# Altium PCB MainPCBV6.PcbDoc (part 5 of 5)
Units mm, origin at the board's own origin, x right, y up, seen from the top; angles counter-clockwise.
Board outline 176 x 144.01 mm, 2 copper layers (Top Layer, Bottom Layer); 232 components, 243 nets, 937 pads, 277 vias.
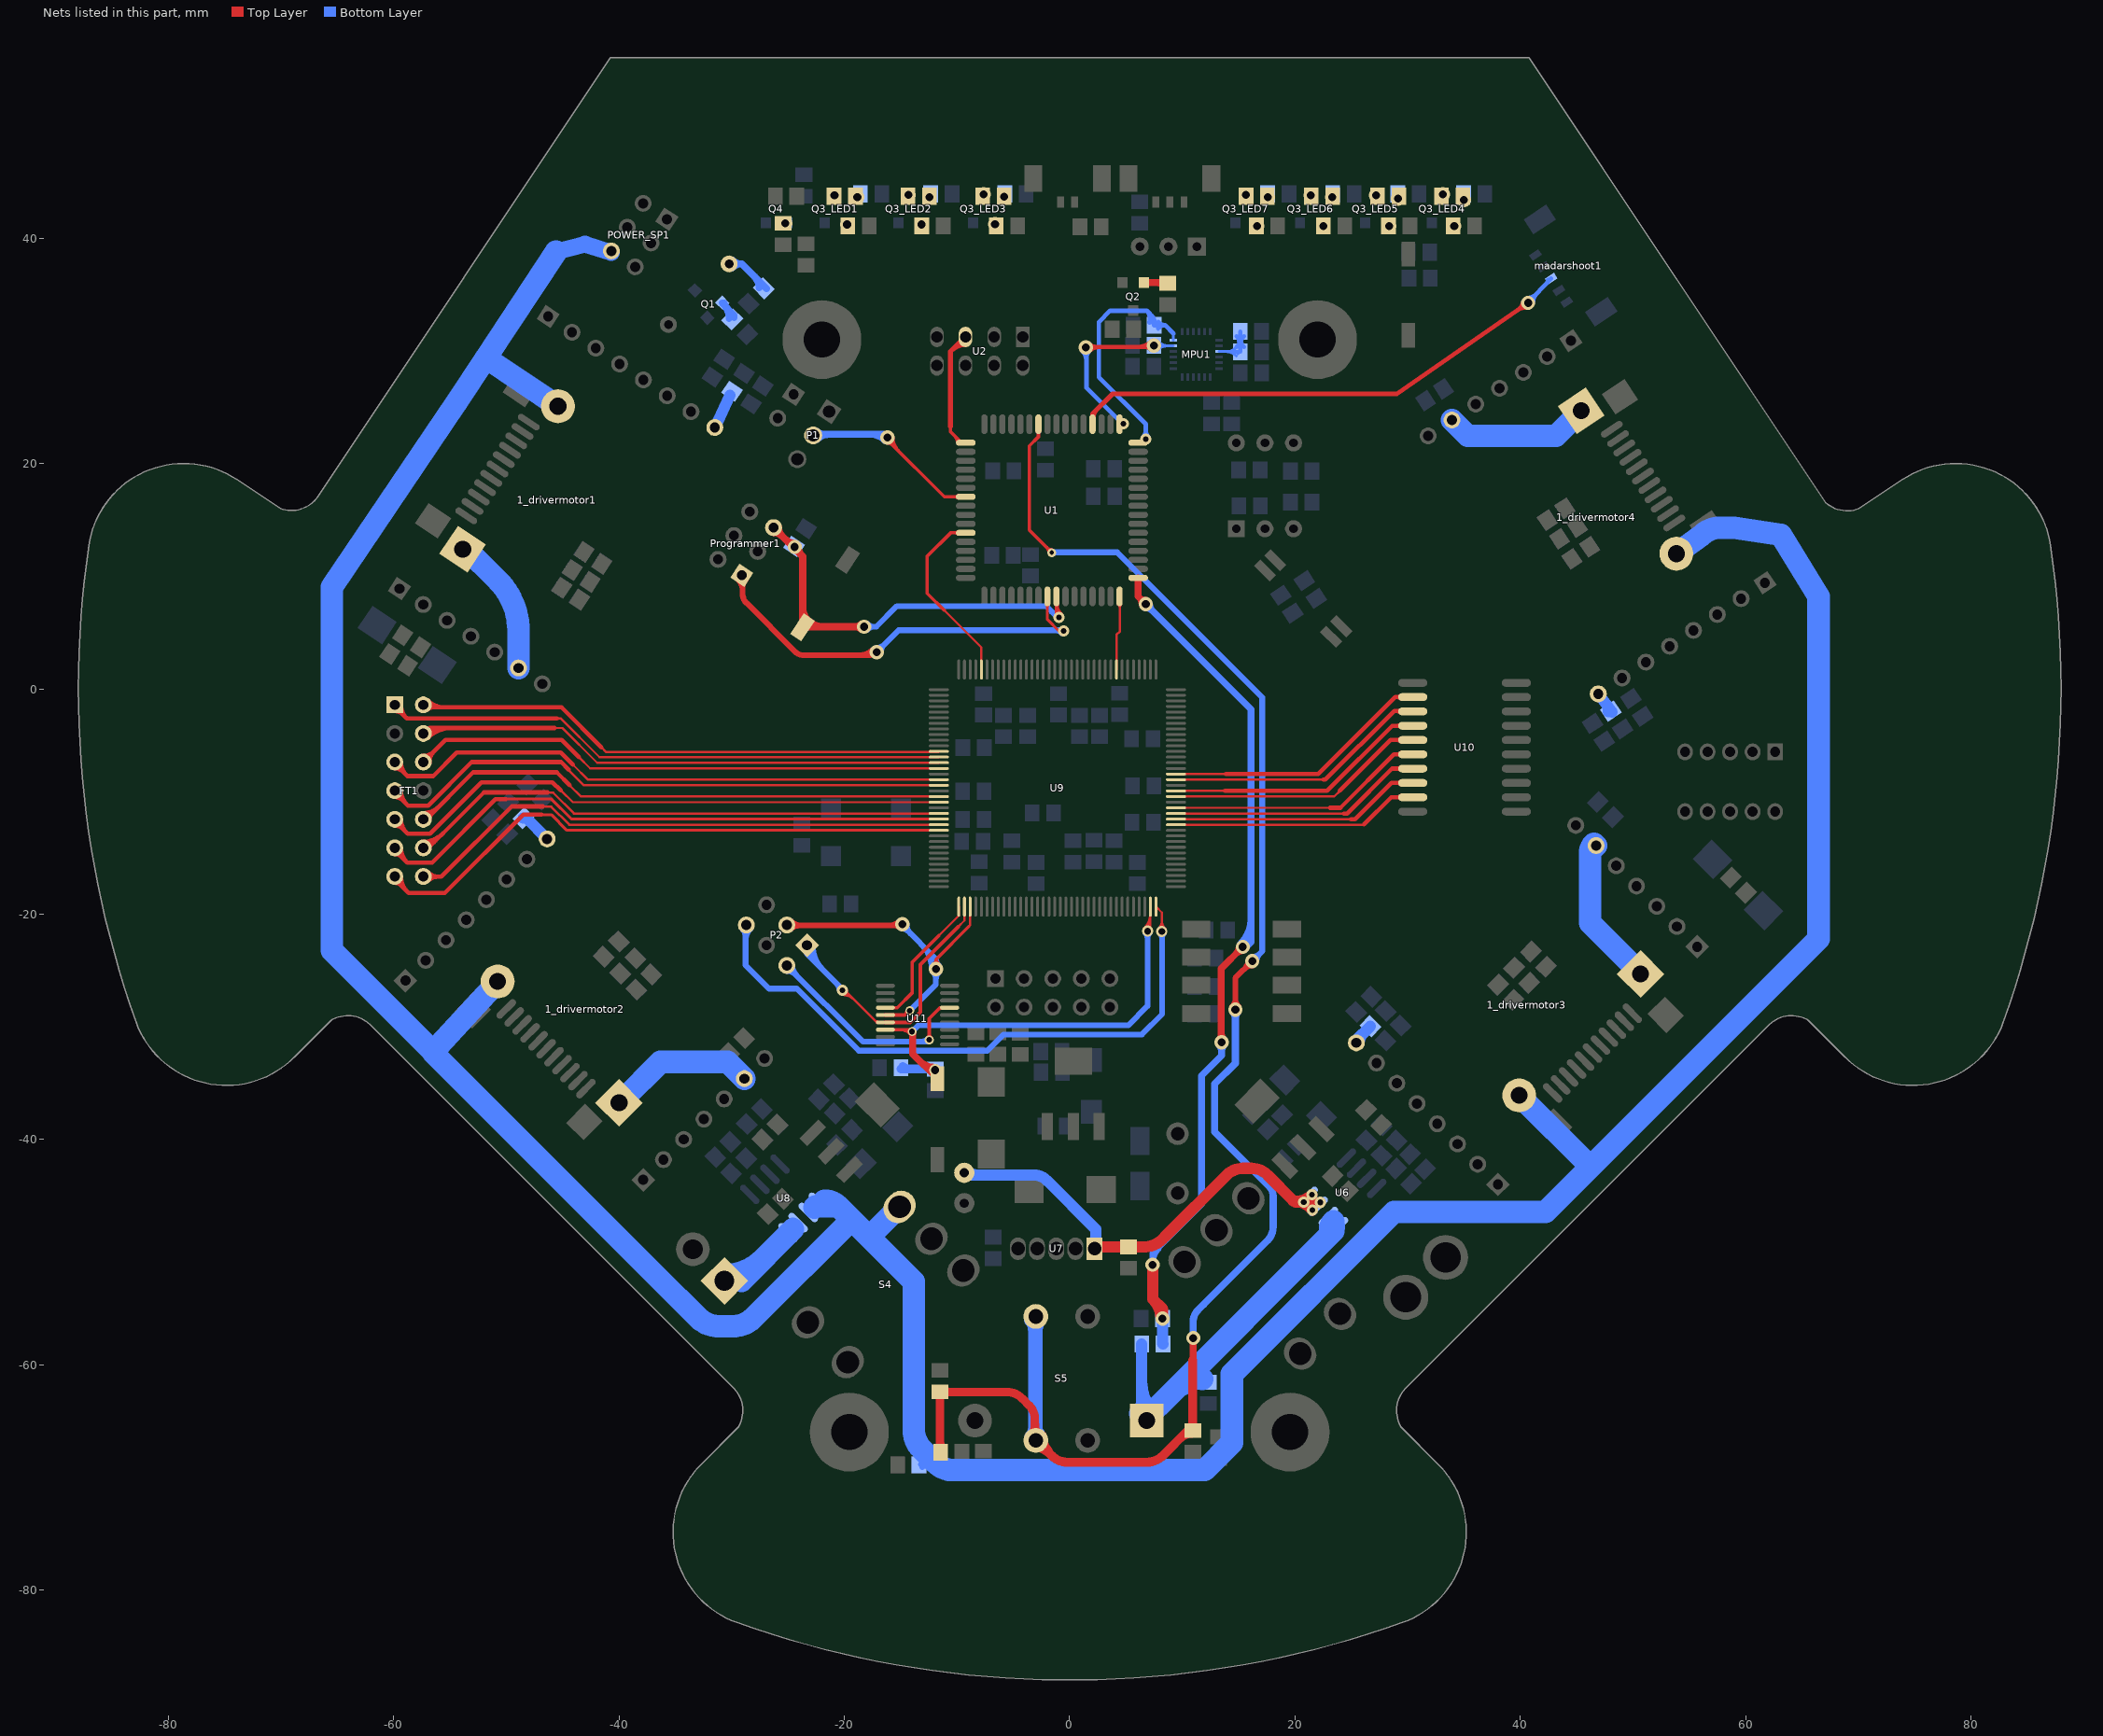
[diagram p5: the nets of this part, all layers, seen from the top]

## Via types
v1: diameter 1.27, hole 0.711, Top Layer to Bottom Layer, 228 vias
v2: diameter 1, hole 0.5, Top Layer to Bottom Layer, 16 vias
v3: diameter 2, hole 1, Top Layer to Bottom Layer, 11 vias
v4: diameter 0.8, hole 0.5, Top Layer to Bottom Layer, 5 vias
v5: diameter 1, hole 0.7, Top Layer to Bottom Layer, 5 vias
v6: diameter 1.2, hole 0.6, Top Layer to Bottom Layer, 3 vias
v7: diameter 1.778, hole 0.965, Top Layer to Bottom Layer, 2 vias
v8: diameter 1, hole 0.6, Top Layer to Bottom Layer, 2 vias
v9: diameter 0.9, hole 0.5, Top Layer to Bottom Layer, 1 vias
v10: diameter 0.7, hole 0.45, Top Layer to Bottom Layer, 1 vias
v11: diameter 1.2, hole 0.9, Top Layer to Bottom Layer, 1 vias
v12: diameter 0.8, hole 0.4, Top Layer to Bottom Layer, 1 vias
v13: diameter 1.1, hole 0.711, Top Layer to Bottom Layer, 1 vias

## Nets (pads, with @x,y where several pads share a name; then routed paths per layer and width w, separated by ;. In a path a pad name is that pad's centre, name@x,y a point inside that pad or via, vN(x,y) a via of type N, cw(c..) or ccw(c..) an arc to the next point about the centre after c; other vN are vias at no path point) (continued)
NetLED1_LED1_1: LED1_LED1.1 R34_LED1.1
  other v1: -18.853,43.637
NetLED1_LED1_2: LED1_LED1.2 Q3_LED1.1
  other v1: -20.879,43.815
NetLED1_LED2_1: LED1_LED2.1 R34_LED2.1
  other v1: -12.446,43.637
NetLED1_LED2_2: LED1_LED2.2 Q3_LED2.1
  other v1: -14.326,43.84
NetLED1_LED3_1: LED1_LED3.1 R34_LED3.1
  other v1: -5.817,43.688
NetLED1_LED3_2: LED1_LED3.2 Q3_LED3.1
  other v1: -7.645,43.891
NetLED1_LED4_1: LED1_LED4.1 R34_LED4.1
  other v1: 34.976,43.409
NetLED1_LED4_2: LED1_LED4.2 Q3_LED4.1
  other v1: 33.122,43.891
NetLED1_LED5_1: LED1_LED5.1 R34_LED5.1
  other v1: 29.159,43.536
NetLED1_LED5_2: LED1_LED5.2 Q3_LED5.1
  other v1: 27.203,43.815
NetLED1_LED6_1: LED1_LED6.1 R34_LED6.1
  other v1: 23.317,43.663
NetLED1_LED6_2: LED1_LED6.2 Q3_LED6.1
  other v1: 21.412,43.815
NetLED1_LED7_1: LED1_LED7.1 R34_LED7.1
  other v1: 17.602,43.637
NetLED1_LED7_2: LED1_LED7.2 Q3_LED7.1
  other v1: 15.646,43.866
NetLS1_2: LS1.2 R16.2 | length 6.9
  Bottom Layer w0.635: LS1.2@-30.234,37.725 -29.115,37.725 R16.2@-26.917,35.528 ; LS1.2@-29.928,37.419 cw(c-29.19,36.681) -29.19,37.725 cw(c-29.19,38.769) LS1.2@-29.928,38.031 ; -27.969,36.579 cw(c-28.931,35.617) R16.2@-27.57,35.617
NetMPU1_9: MPU1.9 R43.1 R44.2 | length 11.8
  Bottom Layer w0.254: MPU1.9@13.26,29.943 15.135,29.943 R44.2@15.136,29.941 ; 13.847,29.943 cw(c13.847,28.618) R44.2@14.783,29.555 ; 13.934,29.943 ccw(c13.934,31.144) R44.2@14.783,30.294 ; 14.46,29.943 cw(c14.46,29.232) R44.2@14.963,29.734
  Bottom Layer w0.381: R43.1@14.811,31.3 cw(c14.027,30.515) 15.136,30.515 cw(c16.246,30.515) R43.1@15.461,31.3 ; R44.2@14.828,30.349 ccw(c14.083,31.094) R43.1@15.136,31.094 ; R44.2@14.871,30.387 ccw(c14.579,30.761) 15.037,30.884 ; R44.2@14.923,30.422 ccw(c14.613,30.96) 15.212,30.8 ; 15.042,30.866 ccw(c15.748,31.055) R44.2@15.383,30.422 ; R43.1@15.136,31.174 ccw(c16.302,31.174) R44.2@15.478,30.349 ; R43.1@15.136,31.725 15.136,29.941 R44.2@15.153,29.925 ; 15.221,30.831 ccw(c15.576,30.735) R44.2@15.388,30.419
NetProgrammer1_1: Programmer1.1 U1.56 | length 44.3
  Top Layer w0.254: U1.56@-2.079,7.495 cw(c-2.332,7.242) -1.975,7.242 cw(c-1.617,7.242) U1.56@-1.87,7.495 ; U1.56@-1.975,8.2 -1.975,6.147 -0.959,5.131 v2(-0.533,5.131)
  Top Layer w0.508: Programmer1.1@-29.456,9.735 cw(c-30.478,8.712) -29.032,8.712 ; -29.032,9.064 cw(c-28.083,9.064) Programmer1.1@-28.754,9.735 ; Programmer1.1@-29.032,10.439 -29.032,8.407 ccw(c-27.928,8.407) -28.709,7.627 -24.395,3.313 ; -24.394,3.312 ccw(c-23.571,4.137) -23.571,2.972 -17.831,2.972 ; -18.751,2.972 ccw(c-18.751,4.873) v1@-17.406,3.529 ; v1@-17.518,3.273 cw(c-17.831,3.285) -17.831,2.972 ; v1(-17.137,3.259) cw(c-17.831,3.953) -17.831,2.972
  Bottom Layer w0.508: v1(-17.137,3.259) -15.189,5.207 -0.61,5.207 v2(-0.533,5.131) ; v1@-17.137,3.64 ccw(c-17.137,4.56) -16.487,3.91 ccw(c-15.836,3.259) v1@-16.756,3.259 ; -1.311,5.207 cw(c-1.311,4.353) v2@-0.707,4.957
NetProgrammer1_5: Programmer1.5 R17.2 Reset1.2 U1.57 | length 48.8
  Top Layer w0.305: U1.57@-1.261,7.513 cw(c-1.471,7.304) -1.175,7.304 cw(c-0.879,7.304) U1.57@-1.088,7.513 ; -1.175,6.959 ccw(c-0.356,6.959) v2@-0.935,6.38 ; U1.57@-1.175,7.695 ccw(c0.38,7.695) v2@-0.719,6.596 ; U1.57@-1.175,8.2 -1.175,6.737 -1.067,6.629 -1.067,6.325 -1.016,6.274 -0.991,6.274 -0.965,6.299 v2(-0.965,6.35)
  Top Layer w0.508: Reset1.2@-23.939,5.067 Reset1.2@-23.698,5.309
  Top Layer w0.635: Programmer1.5@-26.289,14.326 -23.698,11.735 Reset1.2@-23.698,5.309 ; Programmer1.5@-26.287,13.88 cw(c-26.287,12.807) -25.529,13.566 ; Programmer1.5@-25.855,14.312 ccw(c-24.839,14.312) -25.557,13.594 ; -25.212,13.248 ccw(c-24.409,14.05) v1@-24.409,12.916 ; v1@-24.092,12.598 ccw(c-22.957,12.598) -23.76,11.796 ; Reset1.2@-23.939,5.067 -23.495,5.512 v1(-18.263,5.512) ; -23.698,7.192 ccw(c-22.123,7.192) -23.237,6.079 ccw(c-21.868,7.447) -21.868,5.512 ; v1@-18.487,5.287 ccw(c-19.029,4.745) -19.029,5.512 ccw(c-19.029,6.278) v1@-18.487,5.736
  Bottom Layer w0.508: v1(-18.263,5.512) -17.17,5.512 -15.342,7.341 -2.083,7.341 -1.016,6.274 -0.991,6.274 -0.965,6.299 v2(-0.965,6.35) ; v1@-17.993,5.242 cw(c-17.343,4.592) -17.343,5.512 cw(c-17.343,6.432) v1@-17.993,5.781 ; -1.602,6.86 ccw(c-0.965,7.496) v2@-0.965,6.596
  other v1: -24.409,12.598
NetQ1_2: Q1.2 R15.2 | length 3.6
  Bottom Layer w0.6: Q1.2@-30.855,34.256 -29.783,33.184 R15.2@-29.783,32.955 ; Q1.2@-30.778,34.179 cw(c-32.083,32.873) R15.2@-30.237,32.873 ; Q1.2@-30.662,34.263 ccw(c-30.177,34.263) Q1.2@-30.52,33.921
NetQ2_2: Q2.2 R29.1 | length 3
  Top Layer w0.6: Q2.2@6.741,36.073 8.087,36.073 R29.1@8.346,35.814 ; 7.595,36.073 cw(c7.595,34.985) R29.1@8.365,35.755 ; 7.94,36.073 ccw(c7.94,36.675) R29.1@8.365,36.249
NetQ3_Led1_2: Q3_LED1.2 R33_LED1.2
  other v1: -19.761,41.224
NetQ3_Led2_2: Q3_LED2.2 R33_LED2.2
  other v1: -13.157,41.224
NetQ3_Led3_2: Q3_LED3.2 R33_LED3.2
  other v1: -6.629,41.25
NetQ3_LED4_2: Q3_LED4.2 R33_LED4.2
  other v1: 34.138,41.072
NetQ3_LED5_2: Q3_LED5.2 R33_LED5.2
  other v1: 28.372,41.072
NetQ3_LED6_2: Q3_LED6.2 R33_LED6.2
  other v1: 22.53,41.072
NetQ3_LED7_2: Q3_LED7.2 R33_LED7.2
  other v1: 16.637,41.072
NetQ4_2: Q4.2 R54.2
  other v1: -25.248,41.326
PARITY: U1.64 U9.44 | length 7.2
  Top Layer w0.203: U9.44@4.158,1.711 4.158,4.793 4.47,5.105 U1.64@4.47,8.103 ; U1.64@4.303,7.477 cw(c3.897,7.072) 4.47,7.072 ; 4.47,7.29 cw(c4.735,7.29) U1.64@4.548,7.477
PROG_B: C70.2 R55.1 Reset-FPGA.2 U9.143 U11.7 | length 51.3
  Top Layer w0.203: U11.7@-16.337,-30.312 U11.7@-16.325,-30.299 ; v4@-14.214,-30.277 v4@-14.199,-30.277 ; v4@-14.021,-30.455 v4@-13.945,-30.531 ; v8@6.627,-21.232 ccw(c5.346,-19.951) U9.143@7.158,-19.951 ; v8@6.771,-21.376 ccw(c5.836,-20.441) 7.158,-20.441 ; v8(6.909,-21.514) 7.158,-21.265 U9.143@7.158,-19.339 ; v8@6.914,-21.519 ccw(c6.327,-20.932) 7.158,-20.932
  Top Layer w0.305: U11.7@-16.363,-30.261 v4@-14.214,-30.261 ; -14.999,-30.261 cw(c-14.999,-31.433) v4@-14.17,-30.604
  Top Layer w0.6: v4@-13.945,-30.531 -13.945,-32.417 Reset-FPGA.2@-11.76,-34.602 cw(c-11.471,-34.313) Reset-FPGA.2@-11.761,-34.024 ; -13.348,-33.014 ccw(c-11.938,-31.604) Reset-FPGA.2@-11.938,-33.598 ; -13.126,-33.236 ccw(c-11.76,-31.87) Reset-FPGA.2@-11.76,-33.802 ; -12.709,-33.547 cw(c-12.946,-34.43) Reset-FPGA.2@-12.155,-33.973
  Bottom Layer w0.203: v4@-13.894,-30.531 v4@-13.843,-30.582
  Bottom Layer w0.508: v4(-13.995,-30.429) -13.437,-29.87 5.207,-29.87 6.909,-28.169 v8(6.909,-21.514) ; v8@6.735,-21.688 cw(c6.315,-22.108) 6.909,-22.108 cw(c7.503,-22.108) v8@7.083,-21.688
  Bottom Layer w0.8: R55.1@-14.976,-33.757 C70.2@-12.243,-33.757 ; R55.1@-14.799,-33.553 ccw(c-14.307,-33.061) -14.307,-33.757 ; C70.2@-12.521,-33.757 cw(c-12.521,-34.431) C70.2@-12.044,-33.954
  other v13: -11.938,-33.848
SCK: U1.33 U2.5 | length 12.9
  Top Layer w0.305: -10.592,23.292 -10.592,22.835 -9.607,21.85 U1.33@-9.225,21.85 ; -10.188,22.431 cw(c-10.77,21.85) U1.33@-9.947,21.85
  Top Layer w0.432: -10.592,23.292 -10.592,29.947 U2.5@-9.22,31.318 ; -10.5,30.038 cw(c-9.246,28.784) U2.5@-9.246,30.558
SCK_CUR1: U1.43 U9.68 | length 16.8
  Top Layer w0.203: -11.151,6.985 -7.849,3.683 -7.849,3.092 -7.842,3.085 U9.68@-7.842,1.711
  Top Layer w0.305: -11.151,6.985 -12.649,8.484 -12.649,11.768 -10.568,13.85 U1.43@-9.225,13.85 ; U1.43@-9.911,13.763 ccw(c-10.121,13.554) -10.121,13.85 ccw(c-10.121,14.146) U1.43@-9.911,13.936
SEG1A: U9.12 U10.9 | length 22.6
  Top Layer w0.203: U9.12@9.433,-12.064 26.087,-12.064
  Top Layer w0.381: 26.137,-12.04 28.55,-9.627 U10.9@30.452,-9.627 ; U10.9@29.389,-9.739 ccw(c29.117,-10.012) 29.117,-9.627 ccw(c29.117,-9.242) U10.9@29.389,-9.514
SEG1B: U9.18 U10.4 | length 24
  Top Layer w0.203: U9.18@9.433,-9.064 13.767,-9.064
  Top Layer w0.381: 13.767,-9.064 22.839,-9.064 28.626,-3.277 U10.4@30.452,-3.277 ; U10.4@29.389,-3.389 ccw(c29.117,-3.662) 29.117,-3.277 ccw(c29.117,-2.892) U10.4@29.389,-3.164
SEG1C: U9.20 U10.3 | length 24
  Top Layer w0.203: U9.20@9.433,-8.064 22.504,-8.064
  Top Layer w0.381: 22.504,-8.064 22.696,-8.064 28.804,-1.956 30.401,-1.956 U10.3@30.452,-2.007 ; 28.994,-1.956 cw(c28.994,-2.514) U10.3@29.389,-2.119
SEG1D: U9.17 U10.5 | length 23.7
  Top Layer w0.203: U9.17@9.433,-9.564 23.47,-9.564 23.978,-9.056
  Top Layer w0.381: 23.978,-9.056 28.487,-4.547 U10.5@30.452,-4.547 ; U10.5@29.389,-4.659 ccw(c29.117,-4.932) 29.117,-4.547 ccw(c29.117,-4.162) U10.5@29.389,-4.434
SEG1DP: U9.21 U10.2 | length 24.5
  Top Layer w0.203: U9.21@9.433,-7.564 13.868,-7.564
  Top Layer w0.381: 13.868,-7.564 22.078,-7.564 28.905,-0.737 U10.2@30.452,-0.737 ; U10.2@29.389,-0.849 ccw(c29.117,-1.122) 29.117,-0.737 ccw(c29.117,-0.352) U10.2@29.389,-0.624
SEG1E: U9.15 U10.6 | length 23.6
  Top Layer w0.203: U9.15@9.433,-10.564 23.089,-10.564
  Top Layer w0.381: 23.089,-10.564 24.031,-10.564 28.778,-5.817 U10.6@30.452,-5.817 ; U10.6@29.389,-5.929 ccw(c29.117,-6.202) 29.117,-5.817 ccw(c29.117,-5.432) U10.6@29.389,-5.704
SEG1F: U9.13 U10.8 | length 23
  Top Layer w0.203: U9.13@9.433,-11.564 24.952,-11.564
  Top Layer w0.381: 24.952,-11.572 25.341,-11.572 28.556,-8.357 U10.8@30.452,-8.357 ; U10.8@29.389,-8.469 ccw(c29.117,-8.742) 29.117,-8.357 ccw(c29.117,-7.972) U10.8@29.389,-8.244
SEG1G: U9.14 U10.7 | length 23.3
  Top Layer w0.203: U9.14@9.433,-11.064 24.345,-11.064
  Top Layer w0.381: 24.345,-11.072 24.63,-11.072 28.615,-7.087 U10.7@30.452,-7.087 ; U10.7@29.389,-7.199 ccw(c29.117,-7.472) 29.117,-7.087 ccw(c29.117,-6.702) U10.7@29.389,-6.974
SEN-SCL: MPU1.23 R41.2 U1.17 | length 28.7
  Top Layer w0.4: v1@1.702,30.353 v1@7.182,30.353 ; v1@1.73,29.995 cw(c2.595,29.129) 2.595,30.353 ; v1@1.73,30.61 ccw(c2.35,31.23) 2.35,30.353 ; U1.17@4.425,23.5 v2@4.826,23.5 ; 6.121,30.353 ccw(c6.121,31.837) v1@7.17,30.788 ; 6.734,30.353 cw(c6.734,29.736) v1@7.17,30.172 ; v1@7.334,30.582 7.486,30.429 7.518,30.461 7.518,30.556 7.493,30.582 7.493,30.683 7.478,30.668 v1(7.478,30.48)
  Bottom Layer w0.254: v1(7.478,30.48) 7.478,30.668 7.493,30.683 7.493,30.582 7.518,30.556 7.518,30.461 7.486,30.429 R41.2@8.001,30.429 ; R41.2@7.493,30.443 MPU1.23@9.21,30.443 ; R41.2@7.657,30.66 ccw(c8.181,31.183) 8.181,30.443 ; R41.2@7.668,30.67 ccw(c8.217,31.22) 8.217,30.443 ; R41.2@7.837,30.121 cw(c8.614,29.344) 8.614,30.443 ; R41.2@7.837,30.839 ccw(c8.794,31.797) 8.794,30.443 ; R41.2@7.848,30.11 cw(c8.65,29.308) 8.65,30.443 ; R41.2@7.848,30.85 ccw(c8.831,31.833) 8.831,30.443
  Bottom Layer w0.4: v1@1.115,29.995 cw(c0.188,29.068) 1.499,29.068 ; 1.499,29.436 cw(c2.289,29.436) v1@1.73,29.995 ; v1@1.702,30.226 1.499,30.023 1.499,26.721 v2@4.775,23.444 ; 4.09,24.13 ccw(c4.775,24.815) v2@4.775,23.846 ; 4.335,23.884 cw(c3.996,23.546) v2@4.475,23.546
  other v1: 1.422,30.302
  other v2: 4.775,23.546
SEN-SDA: MPU1.24 R42.2 U1.16 | length 26.3
  Top Layer w0.4: U1.16@6.622,21.903 ccw(c6.298,22.227) v2@6.756,22.227 ; U1.16@6.628,21.908 ccw(c6.416,22.174) v2(6.756,22.174) v2@6.756,22.327
  Bottom Layer w0.254: R42.2@7.444,32.191 R42.2@7.916,32.191 ; MPU1.24@9.21,30.943 9.21,31.532
  Bottom Layer w0.4: v2@6.544,22.386 ccw(c6.032,22.898) 6.756,22.898 ccw(c7.481,22.898) v2@6.969,22.386 ; v2(6.756,22.174) 6.756,23.495 2.591,27.661 2.591,32.563 3.601,33.573 6.838,33.573 ; R42.2@7.078,32.531 ccw(c6.125,32.86) 6.838,33.573 ; 7.29,33.121 cw(c6.796,32.628) R42.2@7.456,32.4 ; R42.2@7.444,32.662 7.444,32.967 6.838,33.573 ; R42.2@7.503,32.283 8.458,32.283 ; R42.2@7.85,31.997 cw(c8.458,31.495) 8.458,32.283 ; R42.2@7.85,32.57 ccw(c8.458,33.072) 8.458,32.283 ; 9.21,31.532 8.458,32.283
SHG_PULSE: madarshoot1.3 U1.20 | length 50.1
  Top Layer w0.4: U1.20@2.025,23.5 2.025,24.403 3.81,26.187 29.057,26.187 ; U1.20@2.1,24.1 cw(c3.013,24.1) 2.367,24.745 ; 29.057,26.202 v1(40.691,34.265) ; v1@40.263,34.342 cw(c39.229,34.53) 39.828,33.666 cw(c40.426,32.803) v1@40.613,33.837
  Bottom Layer w0.4: v1@40.679,34.699 ccw(c40.65,35.749) 41.413,35.027 ccw(c42.175,34.305) v1@41.126,34.276 ; v1(40.691,34.265) madarshoot1.3@42.733,36.421 ; 42.359,36.026 ccw(c42.073,36.297) madarshoot1.3@42.467,36.307
SW1: F2.1 R35.2 R39.2 U6.1 U6.2 | length 38.2
  Bottom Layer w1: 6.391,-61.492 ccw(c10.314,-61.492) F2.1@7.54,-64.266 ; R39.2@6.391,-58.166 6.391,-64.531 F2.1@6.807,-64.948 ; F2.1@6.629,-65.176 F2.1@6.833,-64.973
  Bottom Layer w2: F2.1@6.256,-64.338 F2.1@6.562,-64.338 ; F2.1@6.562,-64.229 ccw(c6.562,-62.392) 7.861,-63.69 U6.1@23.419,-48.133 ; F2.1@6.985,-65.253 F2.1@6.985,-64.567 ; 9.883,-61.811 cw(c11.309,-63.237) R35.2@11.776,-61.275 ; 23.13,-47.812 ccw(c22.819,-47.501) 23.259,-47.501 ; U6.1@23.325,-47.994 ccw(c23.014,-47.683) 23.454,-47.683 ; U6.1@23.419,-48.038 23.419,-47.295
SW2: F1_drivermotor1.2 F1_drivermotor2.2 F1_drivermotor3.2 F1_drivermotor4.2 POWER_SP1.6 R36.2 S4.1 U8.1 U8.2 | length 348.3
  Bottom Layer w0.5: R36.2@-13.198,-68.859 -11.836,-68.859 ; R36.2@-13.093,-69.093 cw(c-12.529,-69.657) -12.529,-68.859 ; R36.2@-13.093,-68.527 ccw(c-12.291,-67.726) -12.291,-68.859
  Bottom Layer w1.5: -45.593,38.811 -43.028,39.472 -40.728,38.747 POWER_SP1.6@-40.691,38.735
  Bottom Layer w2: -65.507,-22.987 -65.507,-23.216 -65.498,-23.224 ; -56.464,-32.36 -34.633,-54.191 ; F1_drivermotor2.2@-50.778,-25.981 -56.515,-32.207 -65.498,-23.224 ; -45.593,38.811 -51.822,29.375 ; F1_drivermotor1.2@-45.43,25.085 -51.822,29.375 ; -34.62,-54.178 -32.951,-55.847 ccw(c-31.155,-54.051) -31.513,-56.566 ccw(c-31.155,-54.051) -31.155,-56.591 -29.881,-56.591 ccw(c-29.881,-54.051) -29.523,-56.566 ccw(c-29.881,-54.051) -28.085,-55.847 -19.355,-47.117 ; -22.657,-46.05 -22.553,-45.947 -20.523,-45.947 -20.523,-45.949 ; -21.77,-45.454 cw(c-21.72,-47.145) -20.523,-45.949 ; -21.749,-45.453 cw(c-21.749,-47.217) -20.502,-45.97 ; S4.1@-15.115,-45.976 -17.615,-48.476 -17.996,-48.476 ; -12.002,-68.643 -13.099,-67.546 cw(c-11.303,-65.75) -13.843,-65.75 -13.843,-52.629 -17.996,-48.476 ; -11.801,-68.824 ccw(c-10.206,-66.847) -10.518,-69.367 11.963,-69.367 14.402,-66.929 14.402,-60.833 28.804,-46.431 42.24,-46.431 66.472,-22.2 66.472,8.204 63.149,13.662 59.015,14.305 57.713,14.305 ccw(c57.713,12.022) 56.666,14.05 ccw(c57.713,12.022) 56.099,13.636 F1_drivermotor4.2@53.858,11.999 ; F1_drivermotor3.2@39.9,-36.097 46.237,-42.434 ; -65.498,-23.224 -65.498,9.034 -54.436,25.414 -51.822,29.375 ; -20.523,-45.949 -19.355,-47.117 ; -19.355,-47.117 -17.996,-48.476
SW-CAP: C34.1 R37.2 R38.2 S5.1 U1.26 | length 172.2
  Top Layer w0.305: U1.26@-2.861,22.813 cw(c-3.071,22.604) -2.775,22.604 cw(c-2.479,22.604) U1.26@-2.688,22.813 ; U1.26@-2.775,23.5 -2.775,22.371 -3.581,21.565 -3.581,14.097 v12@-1.626,12.141 ; -2.041,12.556 cw(c-2.507,12.09) v12@-1.848,12.09 ; -1.98,12.495 ccw(c-1.6,12.874) v12@-1.6,12.338
  Top Layer w0.508: R37.2@10.5,-65.852 R37.2@10.947,-65.852 ; v1@14.437,-28.204 ccw(c13.787,-27.554) 14.707,-27.554 ccw(c15.626,-27.554) v1@14.976,-28.204 ; v1(14.707,-28.473) 14.707,-25.679 v1(16.205,-24.181) v1@16.535,-24.181 ; v1@15.824,-24.181 cw(c14.904,-24.181) 15.555,-24.831 cw(c16.205,-25.482) v1@16.205,-24.562
  Top Layer w0.635: 10.973,-59.563 v1(10.973,-57.633)
  Top Layer w0.75: C34.1@-11.726,-62.612 cw(c-12.257,-63.143) -11.506,-63.143 ; R38.2@-11.608,-67.742 -11.506,-67.64 C34.1@-11.506,-62.418 ; C34.1@-11.532,-62.418 C34.1@-11.506,-62.418 ; -11.506,-66.905 ccw(c-10.704,-66.905) R38.2@-11.271,-67.473 ; C34.1@-11.237,-62.612 cw(c-10.768,-63.082) -10.768,-62.418 cw(c-10.768,-61.754) C34.1@-11.237,-62.224 ; S5.1@-3.626,-66.741 ccw(c-4.864,-65.503) -3.114,-65.503 ; -3.573,-63.646 cw(c-4.721,-64.792) -3.099,-64.792 S5.1@-3.099,-66.573 ; -3.574,-63.645 -4.222,-62.997 ccw(c-5.62,-64.396) -4.223,-62.996 ccw(c-5.62,-64.396) -5.62,-62.418 C34.1@-11.506,-62.418 ; -3.088,-65.351 ccw(c-1.338,-65.351) S5.1@-2.575,-66.588
  Top Layer w0.8: S5.1@-3.099,-66.573 -1.575,-68.097 ccw(c-0.226,-66.748) -0.226,-68.656 6.858,-68.656 ccw(c6.858,-66.633) 8.289,-68.064 R37.2@10.5,-65.852 ; S5.1@-3.018,-67.338 cw(c-3.018,-68.804) -1.981,-67.767 ; S5.1@-2.439,-66.314 ccw(c-0.525,-66.314) -1.878,-67.667 ; 9.828,-66.524 cw(c10.847,-67.543) R37.2@10.847,-66.102 ; R37.2@10.922,-65.319 10.922,-59.614 ; 10.922,-65.187 ccw(c11.612,-65.187) R37.2@11.124,-65.675
  Bottom Layer w0.508: v12@-1.626,12.116 4.216,12.116 17.094,-0.762 17.094,-23.292 v1(16.205,-24.181) ; v12@-1.497,11.987 cw(c-1.186,11.677) -1.186,12.116 ; v1@16.205,-23.8 ccw(c16.205,-22.88) 16.856,-23.53 ccw(c17.506,-24.181) v1@16.586,-24.181
  Bottom Layer w0.635: v1@10.973,-57.937 v1(10.973,-57.633) 10.973,-56.134 cw(c12.322,-56.134) 11.368,-55.18 11.887,-54.661 17.557,-48.991 ccw(c16.342,-47.777) 18.059,-47.777 18.059,-45.034 ccw(c16.833,-45.034) 17.701,-44.168 ; v1@14.482,-28.698 cw(c13.94,-29.24) 14.707,-29.24 cw(c15.473,-29.24) v1@14.931,-28.698 ; v1(14.707,-28.473) 14.707,-33.249 12.878,-35.077 12.878,-39.345 17.7,-44.167
  Bottom Layer w1.27: S5.1@-3.417,-56.023 cw(c-4.211,-56.817) -3.088,-56.817 ; S5.1@-3.392,-66.417 ccw(c-4.185,-65.623) -3.063,-65.623 ; -3.063,-65.496 ccw(c-1.94,-65.496) S5.1@-2.734,-66.29 ; S5.1@-3.037,-66.72 S5.1@-3.037,-55.72 ; S5.1@-2.936,-56.563 cw(c-1.813,-56.563) S5.1@-2.607,-55.769
  other v12: -1.6,12.09
TCK: P2.1 U9.110 U11.6 | length 32.3
  Top Layer w0.203: v2@-20.193,-27.17 cw(c-20.193,-28.684) -19.123,-27.613 ; v2@-20.193,-26.967 cw(c-20.193,-27.99) -19.47,-27.266 ; v2@-20.18,-26.759 -19.977,-26.759 -17.125,-29.611 U11.6@-16.363,-29.611 ; v2@-19.795,-26.772 ccw(c-19.385,-26.772) -19.675,-27.061 ; -17.312,-29.424 ccw(c-17.038,-29.151) U11.6@-17.038,-29.538 ; U11.6@-16.337,-29.662 U11.6@-16.292,-29.616 ; -14.173,-29.616 -14.168,-29.611 ; -9.906,-21.133 -9.342,-20.569 U9.110@-9.342,-19.339
  Top Layer w0.305: U11.6@-16.358,-29.616 -16.292,-29.616 -14.173,-29.616 ; -14.168,-29.611 -13.259,-28.702 -13.259,-24.486 -9.906,-21.133
  Bottom Layer w0.508: P2.1@-23.328,-22.767 ccw(c-21.473,-22.767) -22.784,-24.079 ; P2.1@-23.165,-22.708 -23.317,-22.86 -23.317,-23.546 -20.168,-26.695 v2@-20.168,-26.975 ; P2.1@-22.82,-22.767 ccw(c-19.739,-22.767) -21.917,-24.946 ; -20.685,-26.178 cw(c-21.278,-26.772) v2@-20.439,-26.772
  other v2: -20.193,-26.772
TDI: P2.6 U9.144 | length 59.2
  Top Layer w0.203: U9.144@7.658,-19.339 8.179,-19.86 v8(8.179,-21.539) ; v8@7.897,-21.257 ccw(c7.217,-20.577) 8.179,-20.577 ccw(c9.141,-20.577) v8@8.461,-21.257
  Bottom Layer w0.508: P2.6@-29.054,-21.322 cw(c-29.721,-21.989) -28.778,-21.989 ; -28.778,-22.349 cw(c-27.326,-22.349) P2.6@-28.353,-21.322 ; P2.6@-28.778,-20.879 -28.778,-24.536 -26.695,-26.619 -24.232,-26.619 -18.72,-32.131 -7.315,-32.131 -5.867,-30.683 6.401,-30.683 8.204,-28.88 v8@8.204,-21.539 ; v8@8.005,-21.713 cw(c7.524,-22.194) 8.204,-22.194 ; 8.204,-22.072 cw(c8.711,-22.072) v8@8.353,-21.713
TDO: P2.2 U11.17 | length 22.8
  Top Layer w0.203: v4@-12.497,-31.293 v4@-12.497,-31.166
  Top Layer w0.305: v4@-12.646,-30.991 ccw(c-13.069,-30.568) -12.471,-30.568 ccw(c-11.874,-30.568) v4@-12.296,-30.991 ; v4(-12.471,-31.166) -12.471,-29.261 -11.522,-28.311 ; -11.69,-28.48 cw(c-11.338,-28.833) U11.17@-11.338,-28.334
  Bottom Layer w0.508: P2.2@-25.171,-24.74 -24.943,-24.74 -18.364,-31.318 -12.624,-31.318 v4(-12.471,-31.166) ; P2.2@-25.112,-25.059 cw(c-25.112,-26.239) -24.277,-25.405 ; P2.2@-24.616,-24.563 ccw(c-23.4,-24.563) -24.26,-25.423 ; -13.192,-31.318 ccw(c-13.192,-30.445) v4@-12.575,-31.063
TDO_OUT: U9.109 U11.4 | length 12.3
  Top Layer w0.203: -11.62,-21.907 -9.842,-20.129 U9.109@-9.842,-19.339
  Top Layer w0.305: U11.4@-16.363,-28.311 -15.306,-28.311 -13.97,-26.975 -13.97,-24.257 -11.62,-21.907
TMS: P2.3 U9.111 U11.5 | length 43
  Top Layer w0.203: v4@-14.262,-28.511 v4@-14.224,-28.473 ; v4@-14.224,-28.55 v4@-14.199,-28.524 ; -8.966,-21.107 -8.842,-20.983 U9.111@-8.842,-19.339
  Top Layer w0.305: U11.5@-16.363,-28.961 -14.636,-28.961 ; -14.585,-28.911 ccw(c-14.921,-28.575) v4@-14.446,-28.575 ; v4@-14.229,-28.821 ccw(c-14.288,-29.309) -14.636,-28.961 ; v4(-14.199,-28.575) -14.249,-28.575 -14.636,-28.961 ; v1@-12.107,-24.451 ccw(c-12.386,-23.978) -11.836,-23.978 ; v1@-11.836,-24.841 -11.836,-23.978 ; v1@-11.581,-24.474 cw(c-11.226,-23.978) -11.836,-23.978 ; -8.966,-21.107 -11.836,-23.978
  Top Layer w0.508: P2.3@-24.968,-20.599 -24.562,-21.006 -14.656,-21.006 -14.554,-20.904 v1(-14.859,-20.904) ; P2.3@-24.761,-21.322 cw(c-23.997,-22.086) -23.997,-21.006 ; P2.3@-24.761,-20.621 ccw(c-23.831,-19.691) -23.831,-21.006 ; -16.024,-21.006 ccw(c-16.024,-19.739) v1@-15.128,-20.635 ; -15.534,-21.006 cw(c-15.534,-21.579) v1@-15.128,-21.174
  Bottom Layer w0.508: v1@-14.859,-21.285 cw(c-14.859,-21.96) -14.382,-21.483 ; v1@-14.656,-21.006 -14.656,-21.209 -11.862,-24.003 ; v1@-14.478,-20.904 ccw(c-13.313,-20.904) -14.137,-21.728 ; v4(-14.199,-28.575) -11.887,-26.264 v1@-11.887,-24.917 ; -13.123,-22.742 cw(c-15.248,-24.867) v1@-12.243,-24.867 ; -12.256,-23.609 cw(c-13.513,-24.867) v1@-11.735,-24.867 ; v1@-12.131,-25.136 cw(c-12.72,-25.725) -11.887,-25.725 ; v1@-12.119,-24.585 ccw(c-12.65,-24.003) -11.862,-24.003 ; -11.887,-25.848 cw(c-10.881,-25.848) v1@-11.592,-25.136 ; v1(-11.862,-24.867) -11.862,-24.003 ; v1@-11.605,-24.585 cw(c-11.074,-24.003) -11.862,-24.003
TX: P1.2 U1.39 | length 22.2
  Top Layer w0.305: v1@-16.256,22.174 -11.131,17.05 U1.39@-9.225,17.05 ; v1@-16.18,21.819 cw(c-16.18,21.144) -15.703,21.621 ; v1@-16.002,22.301 ccw(c-15.082,22.301) -15.733,21.651 ; v1@-15.697,22.301 ccw(c-14.042,22.301) -15.212,21.13 ; U1.39@-9.911,16.963 ccw(c-10.121,16.754) -10.121,17.05 ccw(c-10.121,17.346) U1.39@-9.911,17.136
  Bottom Layer w0.635: P1.2@-22.809,22.601 -16.556,22.601 v1@-16.154,22.2 ; P1.2@-22.429,22.158 cw(c-21.359,21.088) -21.359,22.601 ; P1.2@-22.429,22.84 ccw(c-21.852,23.418) -21.852,22.601 ; -17.671,22.601 cw(c-17.671,20.81) v1@-16.404,22.077
  other v1: -16.18,22.301
USB_D0: FT1.2 U9.84 | length 50.1
  Top Layer w0.203: -41.58,-5.182 -41.167,-5.594 -11.648,-5.594 U9.84@-11.617,-5.564 ; -12.511,-5.594 ccw(c-12.511,-5.434) U9.84@-12.398,-5.547
  Top Layer w0.381: FT1.2@-57.252,-1.296 ccw(c-56.396,-0.44) -56.396,-1.651 ; FT1.2@-56.983,-1.818 cw(c-56.58,-2.221) -56.58,-1.651 ; FT1.2@-56.983,-1.027 ccw(c-55.476,0.48) -55.476,-1.651 ; FT1.2@-56.871,-1.676 -56.845,-1.651 -45.11,-1.651 -41.58,-5.182
USB_D1: FT1.6 U9.87 | length 49.6
  Top Layer w0.203: -43.558,-6.074 -42.568,-7.064 U9.87@-11.617,-7.064
  Top Layer w0.381: FT1.6@-57.379,-5.943 ccw(c-57.379,-4.592) -56.423,-5.547 ccw(c-55.468,-6.502) FT1.6@-56.819,-6.502 ; FT1.6@-57.277,-6.401 -55.397,-4.521 -45.11,-4.521 -43.558,-6.074
USB_D2: FT1.4 U9.86 | length 52.2
  Top Layer w0.203: -45.72,-3.48 -45.034,-3.48 -41.95,-6.564 U9.86@-11.617,-6.564
  Top Layer w0.381: FT1.4@-57.522,-3.819 cw(c-56.702,-4.639) -56.702,-3.48 ; FT1.4@-57.379,-4.039 -56.82,-3.48 -45.72,-3.48 ; FT1.4@-57.252,-4.089 cw(c-55.783,-5.558) -55.783,-3.48 ; FT1.4@-56.983,-4.358 cw(c-54.863,-6.478) -54.863,-3.48
USB_D3: FT1.9 U9.93 | length 53.6
  Top Layer w0.203: -45.187,-9.017 -45.15,-9.017 -44.103,-10.064 U9.93@-11.617,-10.064
  Top Layer w0.381: FT1.9@-59.944,-11.684 -58.776,-12.852 -56.794,-12.852 -52.236,-8.294 -45.909,-8.294 -45.187,-9.017 ; FT1.9@-59.919,-12.142 cw(c-59.919,-13.186) -59.18,-12.448 ; FT1.9@-59.359,-11.582 ccw(c-57.702,-11.582) -58.874,-12.754
USB_D4: FT1.1 U9.85 | length 52.5
  Top Layer w0.203: -45.5,-2.616 -45.187,-2.616 -41.739,-6.064 U9.85@-11.617,-6.064
  Top Layer w0.381: FT1.1@-60.033,-1.435 -58.852,-2.616 -45.5,-2.616 ; FT1.1@-59.919,-1.982 cw(c-59.919,-3.026) -59.18,-2.288 ; FT1.1@-59.359,-1.422 ccw(c-57.702,-1.422) -58.874,-2.594
USB_D5: FT1.7 U9.90 | length 53.4
  Top Layer w0.203: -44.403,-7.134 -44.403,-7.286 -43.125,-8.564 U9.90@-11.617,-8.564
  Top Layer w0.381: FT1.7@-59.919,-9.602 cw(c-59.919,-10.585) -59.224,-9.89 ; FT1.7@-59.893,-9.22 -58.75,-10.363 -56.947,-10.363 -53.086,-6.502 -45.15,-6.502 -44.461,-7.191 ; FT1.7@-59.359,-9.042 ccw(c-57.64,-9.042) -58.856,-10.258
USB_D6: FT1.10 U9.92 | length 51.2
  Top Layer w0.203: -44.392,-8.56 -43.388,-9.564 U9.92@-11.617,-9.564
  Top Layer w0.381: FT1.10@-57.379,-11.404 ccw(c-57.379,-10.36) -56.64,-11.098 ; FT1.10@-57.379,-11.023 ccw(c-57.379,-9.059) -55.99,-10.448 ; FT1.10@-57.239,-11.697 -52.959,-7.417 -45.535,-7.417 -44.392,-8.56 ; FT1.10@-56.819,-11.582 cw(c-56.082,-11.582) -56.603,-11.061
USB_D7: FT1.5 U9.89 | length 53
  Top Layer w0.203: -44.099,-6.731 -42.767,-8.064 U9.89@-11.617,-8.064
  Top Layer w0.381: FT1.5@-60.071,-6.477 -58.801,-7.747 -56.49,-7.747 -54.404,-5.662 -45.164,-5.662 -44.099,-6.726 -44.099,-6.731 ; FT1.5@-59.919,-7.062 cw(c-59.919,-8.106) -59.18,-7.368 ; FT1.5@-59.359,-6.502 ccw(c-57.702,-6.502) -58.874,-7.674
USB_RD#: FT1.11 U9.96 | length 54.2
  Top Layer w0.254: -50.051,-9.792 -46.01,-9.792 -44.238,-11.564 U9.96@-11.617,-11.564
  Top Layer w0.381: FT1.11@-60.096,-14.122 -58.801,-15.418 -56.591,-15.418 -50.965,-9.792 -50.051,-9.792 ; FT1.11@-59.919,-14.682 cw(c-59.919,-15.603) -59.267,-14.952 ; FT1.11@-59.359,-14.122 ccw(c-57.579,-14.122) -58.838,-15.381
USB_RXF#: FT1.13 U9.98 | length 55.5
  Top Layer w0.254: -46.838,-11.176 -46.018,-11.176 -44.631,-12.564 U9.98@-11.617,-12.564
  Top Layer w0.381: FT1.13@-59.919,-17.222 cw(c-59.919,-18.021) -59.354,-17.456 ; FT1.13@-59.842,-16.535 -59.842,-16.967 -58.674,-18.136 -55.474,-18.136 -48.489,-11.151 -46.863,-11.151 ; FT1.13@-59.74,-16.662 ccw(c-58.757,-16.662) -59.452,-17.357 ; FT1.13@-59.359,-16.662 ccw(c-57.456,-16.662) -58.802,-18.008
USB_TXE#: FT1.14 U9.97 | length 51.1
  Top Layer w0.203: -46.736,-10.465 -46.022,-10.465 -44.423,-12.064 U9.97@-11.617,-12.064
  Top Layer w0.381: FT1.14@-57.328,-16.586 -57.226,-16.688 -55.778,-16.688 -49.53,-10.439 -46.761,-10.439 ; FT1.14@-56.983,-17.058 cw(c-56.089,-17.952) -56.089,-16.688 ; FT1.14@-56.983,-16.267 ccw(c-55.967,-15.25) -55.967,-16.688
USB_WR: FT1.12 U9.95 | length 51.7
  Top Layer w0.203: -46.304,-9.22 -45.853,-9.22 -44.009,-11.064 U9.95@-11.617,-11.064
  Top Layer w0.381: FT1.12@-57.404,-14.046 -56.845,-14.046 -51.994,-9.195 -46.33,-9.195 ; FT1.12@-57.379,-13.944 ccw(c-57.379,-12.409) -56.293,-13.494 ; FT1.12@-57.379,-13.563 ccw(c-57.379,-11.108) -55.643,-12.844
VFB_BATTERY: R39.1 R40.2 U1.1 | length 91.6
  Top Layer w0.6: U1.1@6.075,9.85 6.075,8.2 v1(6.756,7.518) ; v1@6.421,7.518 ccw(c5.613,7.518) 6.185,8.09 ccw(c6.756,8.662) v1@6.756,7.853 ; v1@13.251,-31.158 ccw(c12.801,-30.708) 13.437,-30.708 ; 13.437,-30.463 ccw(c14.419,-30.463) v1@13.724,-31.158 ; v1(13.487,-31.394) v1@13.437,-31.394 ; v1@15.032,-22.911 cw(c14.223,-22.911) 14.795,-23.483 cw(c15.367,-24.055) v1@15.367,-23.246 ; v1@15.596,-22.987 15.291,-22.987 13.437,-24.841 v1@13.437,-31.394 ; v1@13.437,-31.394 13.284,-31.394 13.437,-31.547 v1@13.437,-31.394
  Top Layer w1: v1@7.366,-51.079 7.366,-54.178 8.24,-55.052 v1(8.24,-55.905) ; 7.406,-54.218 cw(c5.719,-55.905) v1@8.105,-55.905
  Bottom Layer w0.6: v1@6.756,7.183 cw(c6.756,6.375) 7.328,6.947 cw(c7.9,7.518) v1@7.091,7.518 ; v1(6.756,7.518) 16.104,-1.829 16.104,-22.479 ; v1@7.346,-50.931 cw(c9.148,-50.931) 7.874,-49.657 ; v1(7.366,-51.13) 7.366,-50.089 11.709,-45.745 11.709,-34.341 13.487,-32.563 v1(13.487,-31.394) ; v1@13.251,-31.631 cw(c12.679,-32.203) 13.487,-32.203 cw(c14.296,-32.203) v1@13.724,-31.631 ; v1@13.437,-31.344 v1@13.564,-31.217 ; v1@15.13,-22.674 ccw(c12.78,-20.324) 16.104,-20.324 ; v1@15.494,-22.601 ccw(c15.707,-22.083) 16.104,-22.479 ; v1@15.554,-23.098 ccw(c14.228,-21.772) 16.104,-21.772 ; v1@15.596,-22.987 16.104,-22.479
  Bottom Layer w1: v1(8.24,-55.905) 8.24,-58.115 R39.1@8.291,-58.166
  other v1: 15.367,-22.911
VFB_MOTOR1: 1_drivermotor1.1 R2.2 | length 3.5
  Bottom Layer w0.508: -30.378,25.873 R2.2@-30.143,26.108
  Bottom Layer w1: 1_drivermotor1.1@-31.502,23.194 R2.2@-30.15,26.06
VFB_MOTOR2: 1_drivermotor2.1 R8.2 | length 2.9
  Bottom Layer w1: R8.2@-48.503,-11.467 -48.249,-11.467 1_drivermotor2.1@-46.355,-13.36
VFB_MOTOR3: 1_drivermotor3.1 R4.2 | length 2.9
  Bottom Layer w1: 1_drivermotor3.1@25.443,-31.429 25.443,-31.199 R4.2@26.695,-29.947 ; 1_drivermotor3.1@25.693,-31.429 cw(c26.85,-31.429) 26.031,-30.611
VFB_MOTOR4: 1_drivermotor4.1 R10.2 | length 2.7
  Bottom Layer w1: 1_drivermotor4.1@46.922,-0.443 48.076,-1.949 R10.2@48.158,-2.057 ; 47.635,-1.374 cw(c46.948,-1.9) R10.2@47.806,-2.014
VKICKER: kick1.1 U8.3 U8.4 | length 12.1
  Bottom Layer w1.5: kick1.1@-30.655,-52.556 kick1.1@-29.137,-52.556 ; -24.562,-47.981 -24.562,-47.701
  Bottom Layer w2: kick1.1@-30.655,-52.056 ccw(c-30.655,-47.184) -27.21,-50.629 ; kick1.1@-29.137,-52.556 -24.562,-47.981
VMOTOR_drivermotor1: 1_drivermotor1.10 F1_drivermotor1.1 | length 13.8
  Bottom Layer w2: F1_drivermotor1.1@-53.884,11.905 cw(c-53.884,9.913) -52.476,11.322 ; F1_drivermotor1.1@-53.591,12.437 -50.761,9.608 cw(c-55.164,5.205) -48.938,5.205 1_drivermotor1.10@-48.938,1.849
VMOTOR_drivermotor2: 1_drivermotor2.10 F1_drivermotor2.1 | length 13.2
  Bottom Layer w2: F1_drivermotor2.1@-39.738,-36.868 -39.738,-36.538 -36.322,-33.122 -30.366,-33.122 1_drivermotor2.10@-28.878,-34.61
VMOTOR_drivermotor3: 1_drivermotor3.10 F1_drivermotor3.1 | length 14.5
  Bottom Layer w2: 46.203,-14.577 cw(c47.385,-14.577) 1_drivermotor3.10@46.549,-13.74 ; 1_drivermotor3.10@46.726,-13.917 46.203,-14.44 46.203,-20.777 50.47,-25.044 F1_drivermotor3.1@50.47,-25.527
VMOTOR_drivermotor4: 1_drivermotor4.10 F1_drivermotor4.1 | length 13
  Bottom Layer w2: 1_drivermotor4.10@33.924,23.861 35.332,22.454 43.179,22.454 F1_drivermotor4.1@45.405,24.679
VSS: C28.2 C29.1 U6.3 U6.4 U7.1 | length 45.4
  Top Layer w1: U7.1@2.261,-50.165 2.261,-49.555 6.528,-49.555 ccw(c6.528,-47.103) 8.262,-48.837 8.496,-48.603 13.918,-43.181 ; U7.1@2.348,-49.266 ccw(c3.045,-48.569) 3.045,-49.555 ; 13.919,-43.18 cw(c15.392,-44.655) 15.392,-42.57 16.129,-42.57 cw(c16.129,-44.594) 17.56,-43.163 19.823,-45.426 ; 19.823,-45.426 ccw(c20.042,-45.207) 20.042,-45.517 ; 20.042,-45.568 v2(20.777,-45.568) ; v2@21.514,-44.907 cw(c20.042,-43.435) 20.042,-45.517 ; v2@21.539,-46.279 ccw(c20.015,-47.422) 20.015,-45.517 20.042,-45.517 ; 21.717,-45.517 20.042,-45.517
  Bottom Layer w1: C29.1@-9.347,-43.155 -3.226,-43.155 cw(c-3.226,-44.872) -2.012,-43.657 2.311,-47.981 U7.1@2.311,-49.428 ; C29.1@-9.076,-42.833 ccw(c-8.3,-42.058) -8.3,-43.155 ; U7.1@2.065,-49.266 ccw(c1.469,-48.671) 2.311,-48.671
  other v2: 21.539,-46.279 22.25,-45.593 21.514,-44.907
pads on no net: 1_drivermotor1.11 1_drivermotor2.11 1_drivermotor3.11 1_drivermotor4.11 BL1_drivermotor1.0 BL1_drivermotor2.0 BL1_drivermotor3.0 BL1_drivermotor4.0 madarshoot1.0 MPU1.2 MPU1.3 MPU1.4 MPU1.5 MPU1.6 MPU1.7 MPU1.12 MPU1.14 MPU1.15 MPU1.16 MPU1.17 MPU1.19 MPU1.21 MPU1.22 OSC-FPGA1.1 Programmer1.3 Programmer1.4 S3.0 S3.3 S4.0 U3.2 U4.2 U5.2 U9.142 U11.2 U11.9 U11.12 U11.13 U11.14 U11.15 U11.16
copper on no net: | length 0.3
  Bottom Layer w0.305: 3.785,10.973 3.988,10.77

## Polygon pours and split planes (outlines as drawn)
AGND on Top Layer "Bottom Layer-No Net" (hatched 45Degree grid 0.2 track 0.2, remove dead copper, pour order 9): -34.158,40.085 -57.391,7.485 -57.556,-22.098 -39.878,-39.776 37.94,-40.311 59.842,-17.225 59.602,8.01 37.846,39.573 -33.973,40.183 -41.983,48.463 41.77,48.463 68.199,8.845 68.199,-22.936 20.422,-70.714 -20.273,-70.714 -68.176,-22.837 -68.176,9.095 -41.983,48.463 -34.158,40.085
GND on Top Layer "Bottom Layer-No Net" (hatched 45Degree grid 0.2 track 0.2, pour order 6): -38.348,-36.703 33.062,-36.653 53.696,-17.073 53.721,5.609 32.523,34.927 -32.908,35.255 -51.361,-0.926 -51.41,-20.959
GND on Bottom Layer "Bottom Layer-No Net" (solid, pour order 12): 41.377,47.447 -38.786,46.939 -63.5,8.052 -63.678,-22.784 -40.361,-45.72 40.843,-45.593 63.703,-21.209 63.144,8.661 41.402,47.447

## Keep-outs
Keep-Out Layer:
  lines w0.254: -68.176,-22.837 -68.176,9.095 -41.983,48.463 41.77,48.463 68.199,8.845 68.199,-22.936 20.422,-70.714 -20.273,-70.714 -68.176,-22.837

## Other copper
Top Layer:
  region net VSS: 21.488,-46.939 22.758,-45.669 21.488,-44.399 20.218,-45.669
  region net MW3_DriverMotor4: 51.831,19.29 51.022,20.504 49.393,19.417 50.202,18.204
  region net MW3_DriverMotor3: 46.868,-33.218 47.955,-32.131 46.558,-30.734 45.471,-31.821
  region net MW3_DriverMotor2: -44.853,-32.058 -45.949,-30.963 -47.385,-32.399 -46.29,-33.495
  region net MW3_DriverMotor1: -52.381,19.01 -50.571,17.882 -49.749,19.201 -51.558,20.329
  region net MW2_DriverMotor4: 50.827,20.865 49.956,22.172 48.113,20.943 48.984,19.637
  region net MW2_DriverMotor3: 48.209,-31.826 49.327,-30.709 48.019,-29.401 46.901,-30.518
  region net MW2_DriverMotor2: -44.78,-34.874 -43.421,-33.515 -44.561,-32.376 -45.92,-33.735
  region net MW2_DriverMotor1: -53.533,17.36 -51.724,16.232 -50.902,17.551 -52.711,18.679
  region net MW1_DriverMotor3: 49.835,-30.455 51.054,-29.235 49.544,-27.725 48.324,-28.944
  region net MW1_DriverMotor2: -43.472,-36.462 -41.923,-34.912 -43.066,-33.769 -44.615,-35.319
  region net MW1_DriverMotor1: -54.6,15.684 -52.791,14.556 -51.968,15.875 -53.778,17.003
  rectangle net 3.3V: -11.532,-27.889 -9.779,-26.06
  region net MW1_DriverMotor4: 49.727,22.62 48.828,23.968 47.025,22.766 47.923,21.418
  rectangle net 3.3V: 1.854,7.341 2.997,9.042
  region net GND: 25.121,5.207 23.736,6.592 22.167,5.022 23.551,3.638
  pour cut-out: 31.775,-47.447 11.557,-47.066 11.227,-48.285 11.709,-49.124 12.192,-49.708 26.695,-49.555 28.702,-49.708 29.947,-50.241 31.852,-52.222 32.817,-52.883 33.858,-53.213 35.331,-52.095 36.322,-50.14 35.331,-48.819 33.825,-47.981
  text "-" at 12.167,42.723 h0.8
  text "-" at -2.896,42.697 h0.8
  text "+" at 1.549,42.672 h0.8
  text "+" at -27.635,39.522 h0.9 r45
  text "M0" at -43.993,36.195 h1 r236.31
  text "KN2C" at -10.643,35.535 h3.3
  text "Small Size Team" at -10.516,34.265 h0.9
  text "-" at -38.735,30.785 h0.8 r45
  text "RX" at -20.345,26.264 h1 r326.31
  text "1" at -26.416,8.153 h0.8 r56.31
  text "M3" at 64.465,6.198 h1 r125
  text "Flash" at 13.767,5.791 h1 r45
  text "1" at -63.17,-1.092 h0.8 r270
  text "3" at -63.246,-3.81 h0.8 r270
  text "1" at -18.415,-22.098 h0.8 r135
  text "M1" at -62.509,-23.393 h1 r315
  text "M2" at 60.884,-23.851 h1 r45
  text "GND" at -36.779,-46.507 h0.8 r315
  text "+" at 36.246,-48.59 h1 r45
  text "+" at -28.397,-55.372 h1 r45
  text "GND" at 26.822,-56.693 h0.6 r45
  text "OFF" at -32.664,-56.794 h1.5 r315
  text "ON" at 29.997,-59.538 h1.5 r45
Bottom Layer:
  region net 2.5V: -16.302,-38.451 -15.418,-37.567 -16.879,-36.105 -17.764,-36.989
  region net GND: -18.51,12.077 -19.634,12.827 -20.896,10.934 -19.772,10.184
  region net VSS: 21.463,-46.914 22.986,-45.391 21.703,-44.108 20.18,-45.631
  region net SW1: 23.305,-48.628 24.714,-47.219 23.493,-45.997 22.083,-47.407
  region net SW2: -21.311,-46.152 -22.847,-44.615 -24.155,-45.923 -22.619,-47.46
  region net VKICKER: -23.19,-47.955 -24.727,-46.419 -26.035,-47.727 -24.498,-49.263
  pour cut-out: 52.883,9.576 52.883,9.373 58.268,12.243 63.363,15.485 58.951,21.924 49.86,12.116 52.603,9.271 52.629,9.398
  pour cut-out: 36.652,-38.113 36.779,-38.291 45.06,-45.682 50.927,-39.7 39.903,-33.68 37.744,-35.674 36.093,-37.643
  pour cut-out: -52.464,-22.022 -53.238,-22.885 -60.033,-30.429 -54.28,-35.992 -48.006,-26.111 -50.419,-23.901 -52.553,-22.479
  pour cut-out: -42.621,26.378 -42.748,26.556 -51.029,33.947 -55.626,26.987 -45.364,21.755 -43.713,23.939 -42.647,26.302

## Silkscreen, mask and mechanical layers (free items; w line width, h text height)
Top Solder:
  region: 49.721,-30.213 50.838,-29.096 49.352,-27.61 48.235,-28.727
  region: 48.235,-31.623 49.352,-30.505 47.981,-29.134 46.863,-30.251
  region: 46.761,-32.944 47.879,-31.826 46.507,-30.455 45.39,-31.572
  region: -54.549,15.76 -52.74,14.632 -51.918,15.951 -53.727,17.079
  region: -52.332,19 -50.588,17.913 -49.784,19.202 -51.528,20.29
  region: -53.45,17.349 -51.705,16.262 -50.902,17.551 -52.646,18.639
  region: -42.164,-34.976 -43.167,-33.972 -44.537,-35.342 -43.534,-36.346
  region: -43.637,-33.503 -44.64,-32.499 -46.01,-33.869 -45.007,-34.872
  region: -44.907,-32.283 -45.91,-31.28 -47.28,-32.65 -46.277,-33.653
  region: 49.494,22.694 48.707,23.875 47.095,22.8 47.883,21.619
  region: 50.688,20.764 49.901,21.944 48.289,20.87 49.076,19.689
  region: 51.831,19.29 51.044,20.471 49.432,19.396 50.219,18.216
  rectangle: -11.557,-27.915 -9.804,-26.06
  lines w2: 13.02,-48.336 31.222,-48.336 33.365,-50.48 ; 28.016,-48.412 cw(c28.016,-54.552) 32.358,-50.211
Bottom Solder:
  region: -22.542,-47.282 -21.539,-46.279 -22.986,-44.832 -23.989,-45.835
  region: -24.486,-49.2 -23.482,-48.196 -24.892,-46.787 -25.895,-47.79
  region: 22.821,-45.327 21.817,-44.324 20.409,-45.733 21.412,-46.736
  region: 24.638,-47.092 23.635,-46.088 22.226,-47.497 23.229,-48.5
  lines w0.254: -32.951,-55.847 -31.899,-55.847 cw(c-31.899,-56.591) -31.155,-56.591 ; -32.817,-56.185 -31.166,-56.185 cw(c-31.166,-56.591) -30.759,-56.591 ; -13.868,-65.913 cw(c-13.868,-66.22) -13.652,-66.003 ; 8.518,-53.244 ccw(c8.518,-53.238) 8.524,-53.238 ; 67.423,-0.2 67.589,-1.067
  lines w1.5: -45.593,38.811 -43.028,39.472 -40.693,38.875
  lines w2: -56.563,-32.162 -50.778,-25.981 ; -51.74,29.159 -45.43,25.085 ; -45.529,38.769 -65.533,8.532 -65.608,-23.317 -40.564,-48.387 ; -40.629,-48.336 -32.091,-56.55 -28.772,-56.534 -20.015,-47.777 -18.313,-47.777 ; -15.259,-46.145 -17.792,-48.679 -13.818,-52.653 -13.816,-66.473 ; -13.843,-65.75 ccw(c-11.303,-65.75) -13.099,-67.546 -12.002,-68.643 ; -12.37,-48.819 -9.474,-51.638 ; -11.801,-68.824 ccw(c-10.206,-66.847) -10.518,-69.367 ; -10.972,-69.317 12.068,-69.314 14.376,-67.005 14.376,-60.865 28.781,-46.457 42.706,-46.455 66.802,-22.354 66.802,8.306 ; -9.576,-51.714 -9.347,-51.714 -7.818,-53.244 8.518,-53.244 ; -8.761,-64.62 ccw(c-11.515,-61.865) -7.62,-61.865 ; -7.569,-64.476 -7.569,-54.295 ; 8.754,-53.11 10.236,-51.537 ; 39.9,-36.097 46.406,-42.672 ; 53.858,11.999 56.666,14.05 58.801,14.3 61.316,14.072 63.221,13.543 ; 63.149,13.662 66.472,8.204

## Text inside footprints (layer, text, board x,y; h text height)
FT1: Top Overlay "2" at -57.887,1.626 h1.27 r270; Top Overlay "1" at -60.427,1.626 h1.27 r270; Top Overlay "14" at -57.887,-18.694 h1.27 r270; Top Overlay "13" at -60.427,-18.694 h1.27 r270
P2: Top Overlay "1" at -21.519,-23.845 h1.27 r135; Top Overlay "2" at -22.956,-26 h1.27 r135; Top Overlay "5" at -27.626,-17.738 h1.27 r135; Top Overlay "6" at -29.422,-19.535 h1.27 r135
POWER_SP1: Bottom Overlay "6" at -41.115,37.326 h1.27 r56.31; Bottom Overlay "5" at -39.002,35.917 h1.27 r56.31; Bottom Overlay "2" at -36.043,44.934 h1.27 r56.31; Bottom Overlay "1" at -34.212,43.102 h1.27 r56.31
Programmer1: Top Overlay "6" at -27.133,16.707 h1.27 r56.31; Top Overlay "5" at -25.019,15.298 h1.27 r56.31; Top Overlay "2" at -32.205,9.099 h1.27 r56.31; Top Overlay "1" at -29.809,8.113 h1.27 r56.31
SPIN_BACK1: Bottom Overlay "10" at 5.098,-27.753 h1.27 r180; Bottom Overlay "9" at 5.098,-25.213 h1.27 r180; Bottom Overlay "1" at -8.618,-25.213 h1.27 r180; Bottom Overlay "2" at -9.126,-27.753 h1.27 r180